# Altium PCB ctrl_board.PcbDoc
Units mm, origin at the board's own origin, x right, y up, seen from the top; angles counter-clockwise.
Board outline 152.4 x 101.6 mm, 2 copper layers (Top Layer, Bottom Layer); 168 components, 108 nets, 401 pads, 1 vias.
Unrouted connection lines stored in the file: 271.
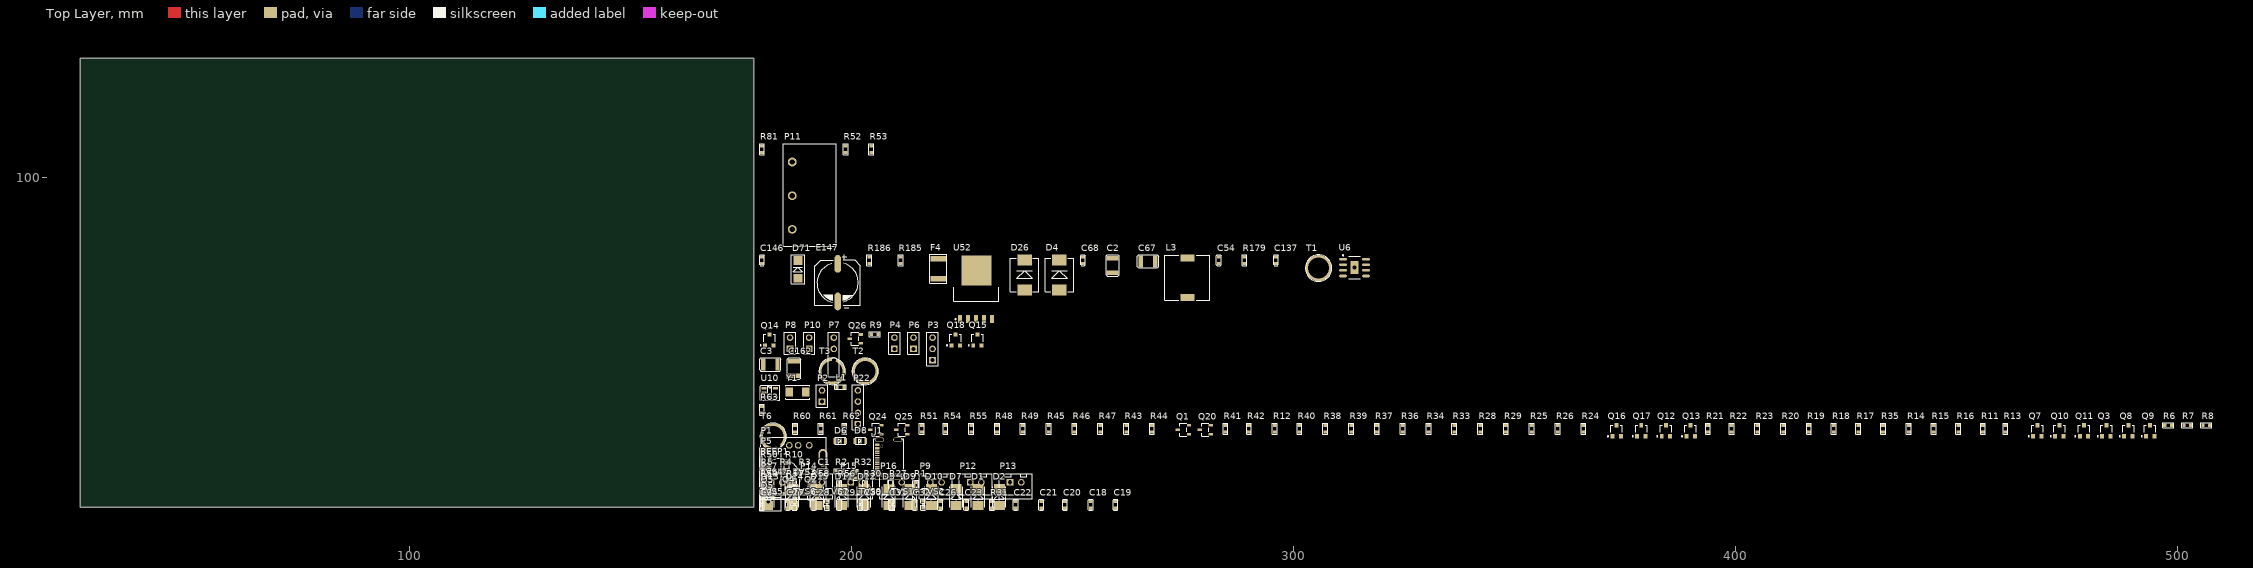
[diagram p0: Top Layer view]
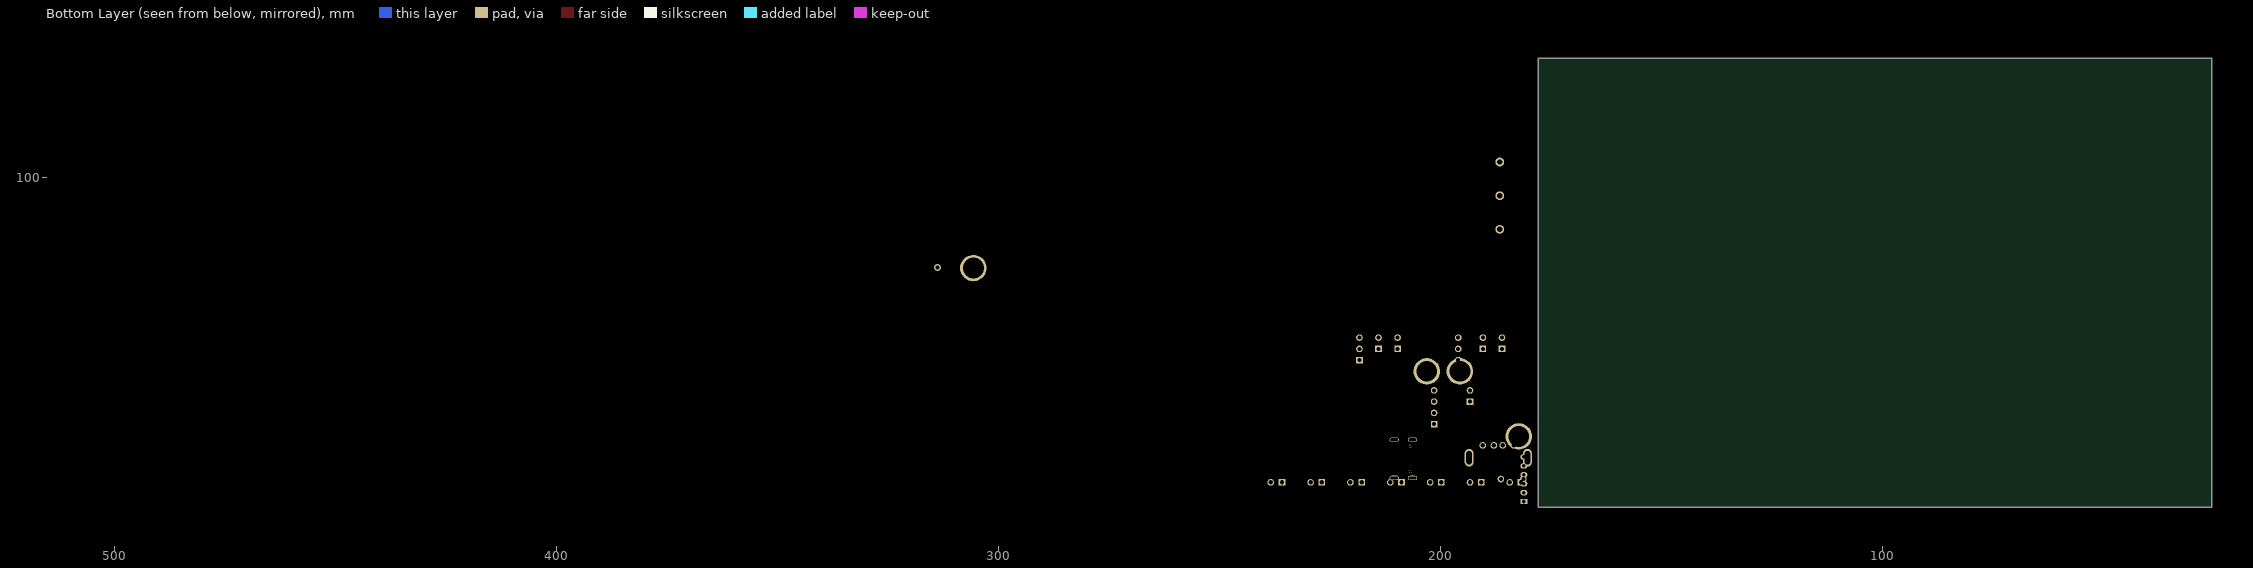
[diagram p1: Bottom Layer view, seen from below]

## Layer stack, top to bottom
Top Layer: signal copper 0.0356
Dielectric: dielectric 0.32, FR-4, Dk 4.8
Bottom Layer: signal copper 0.0356

## Board outline
25.4,25.4 177.8,25.4 177.8,127 25.4,127

## Design rules (kind name [scope] priority, off if disabled: settings)
Clearance [All] p1: gap=0.254
PolygonConnect [All] p1: connectstyle=Relief reliefconductorwidth=0.254 reliefentries=4 polygonreliefangle="90 Angle"
RoutingVias [All] p1: holewidth=0.711 width=1.27 viastyle="Through Hole" minholewidth=0.711 minwidth=1.27 maxholewidth=0.711 maxwidth=1.27
SilkscreenOverComponentPads [All] p1: minsilkscreentomaskgap=0.254
SolderMaskExpansion [All] p1: expansion=0.102
Width [All] p1: maxlimit=0.254 minlimit=0.254 preferedwidth=0.254
27 further rules are at their usual default settings.

## Classes and differential pairs
component class pt100: P11 R52 R53 R81
component class power: C2 C3 C54 C67 C68 C137 C146 D4 D26 D71 E147 F4 L3 Q6 R179 R185 R186 T2 T3 U6 U52
component class lcd: P5 R10 R63 TVS3 TVS4
component class drv: BEEP1 D1 D2 D3 D7 D9 D10 D11 D12 D13 D14 D15 P3 P4 P6 P7 P8 P9 P10 P12 P13 P14 P15 P16 P17 Q1 Q2 Q4 Q5 Q8 Q9 Q10 Q11 Q12 Q13 Q14 Q15 Q16 Q17 Q18 Q20 Q24 Q25 Q26 R6 R7 R8 R11 R13 R14 R15 R17 R18 R19 R20 R21 R22 R23 R24 R25 R26 R27 R28 R29 R30 R33 R34 R36 R37 R38 R39 R40 R41 R42 R43 R44 R45 R46 R47 R48 R49 R50 R51 R54 R55 R56 R57 R58 R59 R60 R61 R62 T1 TVS1 TVS2 TVS5 TVS6 TVS7 TVS9
component class cpu: C1 C18 C19 C20 C21 C22 C23 C26 C27 C28 C29 C30 C31 C32 C34 L1 P2 P22 R1 R2 R3 R4 R5 R9 R31 U3 U10 Y1
component class connector: D5 D6 D8 J1 P1

## Components (designator, comment, footprint, x,y, rotation, side; value= is the part's Value field where it differs from the comment)
BEEP1 "BEEP-9.5X5.5" BEEP-9.5X5.5 183.769,31.75 r0 top
C1 "0.1uF/50V/X5R" 0603C 192.659,33.528 r0 top
C2 "47uF/25V" 1210C 259.08,78.486 r90 top
C3 "22uF/10V" 1210C 179.959,57.658 r0 top
C18 "1uF/50V/X5R" 0603C 254.127,25.146 r90 top
C19 "0.1uF/50V/X5R" 0603C 259.715,25.146 r90 top
C20 "0.1uF/50V/X5R" 0603C 248.285,25.146 r90 top
C21 "0.1uF/50V/X5R" 0603C 242.951,25.146 r90 top
C22 "0.1uF/50V/X5R" 0603C 237.109,25.146 r90 top
C23 "0.1uF/50V/X5R" 0603C 225.933,25.146 r90 top
C26 "12P 50V" 0603C 220.091,25.146 r90 top
C27 "1uF/50V/X5R" 0603C 185.547,25.146 r90 top
C28 "0.1uF/50V/X5R" 0603C 191.389,25.146 r90 top
C29 "1uF/50V/X5R" 0603C 197.231,25.146 r90 top
C30 "0.1uF/50V/X5R" 0603C 203.073,25.146 r90 top
C31 "1uF/50V/X5R" 0603C 208.915,25.146 r90 top
C32 "0.1uF/50V/X5R" 0603C 214.249,25.146 r90 top
C34 "12P 50V" 0603C 179.705,25.146 r90 top
C54 "1uF" 0603C 283.083,80.518 r90 top
C67 "22uF/10V" 1210C 265.43,81.026 r0 top
C68 "0.1uF" 0603C 252.349,80.518 r90 top
C137 "0.01uF" 0603C 296.037,80.518 r90 top
C146 "0.1uF/50V" 0603C 179.705,80.518 r90 top
C162 "47uF/25V" 1210C 186.944,55.118 r90 top
D1 "1N4007" DO-214-AC 228.6,27.686 r90 top
D2 "1N4007" DO-214-AC 233.426,27.686 r90 top
D3 "1N4007" DO-214-AC 208.407,27.686 r90 top
D4 "SS54" SMC 247.015,74.549 r90 top
D5 "CESDB5V0D3" SOD323 179.578,27.94 r0 top
D6 "CESDB5V0D3" SOD323 196.215,40.386 r0 top
D7 "1N4007" DO-214-AC 223.647,27.686 r90 top
D8 "CESDB5V0D3" SOD323 200.787,40.386 r0 top
D9 "1N4007" DO-214-AC 213.233,27.686 r90 top
D10 "1N4007" DO-214-AC 218.059,27.686 r90 top
D11 "1N4007" DO-214-AC 197.739,27.686 r90 top
D12 "1N4007" DO-214-AC 202.819,27.686 r90 top
D13 "1N4007" DO-214-AC 180.975,27.686 r90 top
D14 "1N4007" DO-214-AC 186.563,27.686 r90 top
D15 "1N4007" DO-214-AC 192.151,27.686 r90 top
D26 "SMCJ24CA" SMC 239.141,74.549 r90 top
D71 "5.1V" SMA 187.833,77.216 r90 top
E147 "47uF/50V" Φ10×10 196.85,76.2 r0 top
F4 "2A" 1812-F 219.583,77.089 r90 top
J1 "TYPE C_16P" TYPEC_16P 210.058,36.322 r90 top
L1 "MPZ1608D101BTA00" 0603R 196.723,52.578 r0 top
L3 "CDRH105NP-100NC" CDRH105 270.891,82.423 r0 top
P1 "Header 6" USB-A 183.388,39.37 r0 top
P2 "Header 2" HDR1X2 193.294,49.276 r90 top
P3 "Header 3" HDR1X3 218.313,58.674 r90 top
P4 "Header 2" HDR1X2 209.677,61.214 r90 top
P5 "Header 6" 6X2MMZ 181.102,26.67 r90 top
P6 "Header 2" HDR1X2 213.995,61.214 r90 top
P7 "Header 4" HDR1X4 195.961,56.134 r90 top
P8 "Header 2" HDR1X2 186.055,61.214 r90 top
P9 "SIP-2" SIP-2A 219.075,30.988 r0 top
P10 "Header 2" HDR1X2 190.373,61.214 r90 top
P11 "Header 3" KF7.62-3P 186.563,88.265 r90 top
P12 "SIP-2" SIP-2A 228.092,30.988 r0 top
P13 "SIP-2" SIP-2A 237.109,30.988 r0 top
P14 "SIP-2" SIP-2A 192.024,30.988 r0 top
P15 "SIP-2" SIP-2A 201.041,30.988 r0 top
P16 "SIP-2" SIP-2A 210.058,30.988 r0 top
P17 "SIP-2" SIP-2A 183.007,30.988 r0 top
P22 "Header 4" HDR1X4 201.422,44.196 r90 top
Q1 "S8050" SOT23-3 276.352,41.91 r0 top
Q2 "MMBT9015" SOT23-3 192.151,27.559 r0 top
Q3 "BC817-16" SOT-23 483.997,42.672 r0 top
Q4 "MMBT9015" SOT23-3 187.198,27.559 r0 top
Q5 "MMBT9015" SOT23-3 182.245,27.559 r0 top
Q7 "AO3400" SOT-23 468.376,42.672 r0 top
Q8 "BC817-16" SOT-23 488.95,42.672 r0 top
Q9 "BC817-16" SOT-23 493.903,42.672 r0 top
Q10 "AO3400" SOT-23 473.329,42.672 r0 top
Q11 "AO3400" SOT-23 478.917,42.672 r0 top
Q12 "BC817-16" SOT-23 384.302,42.672 r0 top
Q13 "BC817-16" SOT-23 389.89,42.672 r0 top
Q14 "LH8050QLT1G" SOT-23 181.356,63.246 r0 top
Q15 "BC817-16" SOT-23 228.473,63.246 r0 top
Q16 "AO3400" SOT-23 373.126,42.672 r0 top
Q17 "AO3400" SOT-23 378.714,42.672 r0 top
Q18 "AO3400" SOT-23 223.52,63.246 r0 top
Q20 "S8050" SOT23-3 281.305,41.91 r0 top
Q24 "S8050" SOT23-3 206.756,41.91 r0 top
Q25 "S8050" SOT23-3 212.598,41.91 r0 top
Q26 "S8050" SOT23-3 202.057,62.484 r0 top
R1 "10K" 0603R 214.503,29.464 r90 top
R2 "10K" 0603R 196.596,33.528 r0 top
R3 "100K" 0603R 188.341,33.528 r0 top
R4 "100K" 0603R 184.023,33.528 r0 top
R5 "20K" 0603R 179.705,33.528 r0 top
R6 "100R" 0603R 497.205,43.942 r0 top
R7 "100R" 0603R 501.523,43.942 r0 top
R8 "100R" 0603R 505.841,43.942 r0 top
R9 "49.9" 0603R 204.47,64.516 r0 top
R10 "100R" 0603R 185.293,33.782 r90 top
R11 "10K" 0603R 456.057,42.418 r90 top
R12 "100" 0603R 295.783,42.418 r90 top
R13 "10K" 0603R 461.137,42.418 r90 top
R14 "10K" 0603R 439.293,42.418 r90 top
R15 "10K" 0603R 444.881,42.418 r90 top
R16 "10K" 0603R 450.469,42.418 r90 top
R17 "10K" 0603R 427.863,42.418 r90 top
R18 "1K" 0603R 422.275,42.418 r90 top
R19 "1K" 0603R 416.687,42.418 r90 top
R20 "10K" 0603R 410.845,42.418 r90 top
R21 "100R" 0603R 393.827,42.418 r90 top
R22 "100R" 0603R 399.161,42.418 r90 top
R23 "100R" 0603R 405.003,42.418 r90 top
R24 "1K" 0603R 365.633,42.418 r90 top
R25 "10K" 0603R 353.949,42.418 r90 top
R26 "10K" 0603R 359.791,42.418 r90 top
R27 "10K" 0603R 208.915,29.464 r90 top
R28 "10K" 0603R 342.265,42.418 r90 top
R29 "10K" 0603R 348.107,42.418 r90 top
R30 "10K" 0603R 203.073,29.464 r90 top
R31 "100K" 0603R 231.775,25.146 r90 top
R32 "10K" 0603R 200.914,32.004 r90 top
R33 "10K" 0603R 336.423,42.418 r90 top
R34 "10K" 0603R 330.581,42.418 r90 top
R35 "10K" 0603R 433.451,42.418 r90 top
R36 "1K" 0603R 324.739,42.418 r90 top
R37 "1K" 0603R 318.897,42.418 r90 top
R38 "10K" 0603R 307.213,42.418 r90 top
R39 "10K" 0603R 313.055,42.418 r90 top
R40 "100" 0603R 301.371,42.418 r90 top
R41 "1K" 0603R 284.607,42.418 r90 top
R42 "1K" 0603R 289.941,42.418 r90 top
R43 "1K" 0603R 262.128,42.418 r90 top
R44 "1K" 0603R 267.97,42.418 r90 top
R45 "10K" 0603R 244.602,42.418 r90 top
R46 "10K" 0603R 250.444,42.418 r90 top
R47 "10K" 0603R 256.286,42.418 r90 top
R48 "100" 0603R 232.918,42.418 r90 top
R49 "100" 0603R 238.76,42.418 r90 top
R50 "100" 0603R 179.705,33.782 r90 top
R51 "1K" 0603R 215.9,42.418 r90 top
R52 "2K" 0603R 198.628,105.664 r90 top
R53 "2K" 0603R 204.47,105.664 r90 top
R54 "1K" 0603R 221.234,42.418 r90 top
R55 "1K" 0603R 227.076,42.418 r90 top
R56 "51R" 0603R 197.231,29.464 r90 top
R57 "4.7K" 0603R 185.547,29.464 r90 top
R58 "1K" 0603R 191.389,29.464 r90 top
R59 "47K" 0603R 179.705,29.464 r90 top
R60 "1K" 0603R 187.198,42.418 r90 top
R61 "1K" 0603R 193.04,42.418 r90 top
R62 "10K" 0603R 198.374,42.418 r90 top
R63 "100R" 0603R 179.705,46.736 r90 top
R81 "75" 0603R 179.705,105.664 r90 top
R179 "100K" 0603R 288.925,80.518 r90 top
R185 "120K/1%" 0603R 211.074,80.518 r90 top
R186 "71.5K/1%" 0603R 203.962,80.518 r90 top
T1 "12V-" FIX-4.5 305.689,79.502 r0 top
T2 "12V" FIX-4.5 203.073,56.134 r0 top
T3 "GND" FIX-4.5 195.58,56.134 r0 top
T6 "12V" FIX-4.5 182.245,41.402 r0 top
TVS1 "ESD5Z5.0CT1G" SOD-523 209.296,26.035 r90 top
TVS2 "ESD5Z5.0CT1G" SOD-523 216.154,26.035 r90 top
TVS3 "ESD5Z5.0CT1G" SOD-523 187.071,30.48 r90 top
TVS4 "ESD5Z5.0CT1G" SOD-523 179.705,30.48 r90 top
TVS5 "ESD5Z5.0CT1G" SOD-523 179.705,26.035 r90 top
TVS6 "ESD5Z5.0CT1G" SOD-523 187.071,26.035 r90 top
TVS7 "ESD5Z5.0CT1G" SOD-523 194.437,26.035 r90 top
TVS9 "ESD5Z5.0CT1G" SOD-523 201.93,26.035 r90 top
U6 "LM22676MRE-5.0/NOPB" SOP127P600X168_HS-8N 313.817,79.629 r0 top
U10 "AD8615AUJZ-R2" sot-23-5 181.483,51.308 r0 top
U52 "MIC29302" TO228P1435X457-6N 224.536,67.945 r90 top
Y1 "8MHz" CRAY_5032 185.928,51.435 r0 top

## Footprints (in the part's own frame and the unit in brackets; to place one, negate y for a bottom-side part, rotate by r counter-clockwise, add the part's x,y. Pads: shape width x height; smd on the part's side, far side on the other; paste and mask are expansions set on the pad)
6X2MMZ [mm]
  rect 1.2x1.6 hole 0.8: 1(0,0)
  oval 1.2x1.6 hole 0.8: 2(2,0) 3(4,0) 4(6.05,0) 5(8.05,0) 6(10.08,0)
  silkscreen extent -2.05,-2.95 12.12,1.85
0603C [mm]
  rect 0.7x0.85 smd: 1(0,0) 2(1.5,0)
  silkscreen extent -0.5,-0.55 2,0.55
0603R [mm]
  rect 0.7x0.85 smd: 1(0,0) 2(1.5,0)
  silkscreen extent -0.5,-0.55 2,0.55
1210C [mm]
  rect 1x2.7 smd: 1(0,0) 2(3.25,0)
  silkscreen extent -0.8,-1.5 4.05,1.5
1812-F [mm]
  rect 1.3x3.5 smd: 1(0,0) 2(4.5,0)
  silkscreen extent -1,-1.95 5.5,1.95
BEEP-9.5X5.5 [mm]
  round 1.5 hole 0.9: 1(-2.54,0) 2(2.54,0)
  silkscreen extent -4.6,-4.6 4.6,4.6
CDRH105 [mm]
  rect 3.2x1.6 smd: 1(5.1,-0.65) 2(5.1,-9.55)
  silkscreen extent 0,-10.2 10.2,0
CRAY_5032 [mm]
  rect 1.7x2 smd: 1(0,0) 2(3.7,0)
  silkscreen extent -0.86,-1.6 4.55,1.6
DO-214-AC [mm]
  rect 2x2.5 smd: 1(-1.915,0) 2(1.915,0)
  silkscreen extent -2.3,-1.52 2.3,1.5, body extent -2.3,-1.35 2.3,1.35, height 2.4
FIX-4.5 [mm]
  round 6 hole 4.7: 1(0,0)
  silkscreen extent -3,-3 3,3
HDR1X2 [mm] "Connector; Header; 2 Position"
  rect 1.5x1.5 hole 0.9: 1(0,0)
  round 1.5 hole 0.9: 2(2.54,0)
  silkscreen extent -1.27,-1.27 3.81,1.27
HDR1X3 [mm] "Connector; Header; 3 Position"
  rect 1.5x1.5 hole 0.9: 1(0,0)
  round 1.5 hole 0.9: 2(2.54,0) 3(5.08,0)
  silkscreen extent -1.27,-1.27 6.35,1.27
HDR1X4 [mm] "Connector; Header; 4 Position"
  rect 1.5x1.5 hole 0.9: 1(0,0)
  round 1.5 hole 0.9: 2(2.54,0) 3(5.08,0) 4(7.62,0)
  silkscreen extent -1.27,-1.27 8.89,1.27
KF7.62-3P [mm]
  round 2 hole 1.3: 1(0,0)
  round 2 hole 1.2: 2(7.62,0) 3(15.24,0)
  silkscreen extent -3.81,-10 19.38,2
SIP-2A [mm]
  rect 1.5x1.5 hole 1: 1(-1.27,0)
  round 1.5 hole 1: 2(1.27,0)
  silkscreen extent -3.75,-3.68 3.75,2.02, body extent -3.7,-3.81 3.7,2.29, height 7.5
SMA [mm]
  rect 2x2 smd: 1(0,0) 2(4,0)
  silkscreen extent -1.3,-1.5 5.3,1.5
SMC [mm]
  rect 2.5x3.3 smd: 1(0,0) 2(6.75,0)
  silkscreen extent -0.35,-3.25 7.15,3.25
SOD323 [mm]
  rect 0.65x1.35 smd: 1(0,0) 2(2.4,0)
  silkscreen extent -0.03,-0.8 2.44,0.8
SOD-523 [mil]
  rect 31.5x30 smd: 1(-30,0) 2(30,0)
  silkscreen extent -51,-20 51,20, body extent -31,-16 31,16, height 26
SOP127P600X168_HS-8N [mm] "SOP, 8-Leads, Body 5.0x4.0mm (max), Pitch 1.27mm, IPC Medium Density"
  oval 1.75x0.6 smd: 1(-2.6,1.905) 2(-2.6,0.635) 3(-2.6,-0.635) 4(-2.6,-1.905) 5(2.6,-1.905) 6(2.6,-0.635) 7(2.6,0.635) 8(2.6,1.905)
  rect 1.9x3 smd: 9(0,0)
  silkscreen extent -2.72,-2.5 1.33,2.88, body extent -2,-2.5 2,2.5, height 1.68
SOT23-3 [mm]
  rect 1x0.6 smd: 1(0,0) 2(0,2) 3(-2.5,1)
  silkscreen extent -2.1,-0.5 -0.5,2.5
SOT-23 [mm] "SOT-23; 3 Leads; Body 3.0 x 2.6 mm, inc. leads (LxW max)"
  rect 0.9x0.95 smd: 1(-0.95,-1.25) 2(0.95,-1.25) 3(0,1.25)
  silkscreen extent -2.07,-1.37 1.3,1.25
sot-23-5 [mm]
  rect 1.2x0.5 smd: 1(-1.3,1) 2(-1.3,0) 3(-1.3,-1) 4(1.3,-1) 5(1.3,1)
  silkscreen extent -2.2,-1.7 2.2,1.7
TO228P1435X457-6N [mm] "D2-PAK, 6-Pads, Body 8.6x10.2mm (max), IPC Medium Density"
  rect 1.85x0.95 smd: 1(0,0) 2(0,-1.8) 3(0,-3.6) 4(0,-5.4) 5(0,-7.2)
  rect 6.8x6.8 smd: 6(11,-3.671)
  silkscreen extent -0.12,-8.77 7.2,1.43, body extent 4.2,-8.77 12.84,1.43, height 4.57
TYPEC_16P [mm]
  oval 1x2.1 hole 0.65 slot 1.7 at 90 deg: 1(-4.32,-0.391) 1(-4.32,3.759) 1(4.32,-0.391) 1(4.32,3.759)
  round 0.67 hole 0.67: 2(-2.89,3.259) 2(2.89,3.259)
  rect 0.3x1 smd: A1(-3.05,4.293) A4(-2.25,4.293) A5(-1.25,4.293) A6(-0.25,4.293) A7(0.25,4.293) A8(1.25,4.293) A9(2.25,4.293) A12(3.35,4.293) B1(3.05,4.293) B4(2.55,4.293) B5(1.75,4.293) B6(0.75,4.293) B7(-0.75,4.293) B8(-1.75,4.293) B9(-2.55,4.293) B12(-3.35,4.293)
  silkscreen extent -4.44,-1.73 4.49,5.07
USB-A [mm]
  round 1.5 hole 1: 1(0,0) 2(2.5,0) 3(4.5,0) 4(7,0)
  oval 2x4 hole 1.2 slot 3 at 90 deg: 5(-3.1,-2.8) 6(10.1,-2.8)
  silkscreen extent -3.91,-12.17 10.89,1.83
Φ10×10 [mm]
  oval 1.524x4 smd: 1(0,4.25) 2(0,-4.25)
  silkscreen extent -5.15,-5.71 5.15,6.35

## Part data
C1 C18 C19 C20 C21 C22 C23 C26 C27 C28 C29 C30 C31 C32 C34: library part CAP4, "贴片电容 20%"
C2 C3 C54 C67 C68 C137 C162: library part CAP, "Capacitor"
C146: library part Cap, "Capacitor"
D1 D2 D3 D7 D9 D10 D11 D12 D13 D14 D15: library part DIODE2, "贴片二极管"
D4 D5 D6 D8 D26 D71: library part "DIODE S", "Schottky Diode"
E147: library part "Cap Pol1", "Polarized Capacitor (Radial)"
F4: library part "Fuse 1", "Fuse"
L1: library part CIZHU1, "磁珠电感 100R 100MHz"
L3: library part INDUCTOR
P1 P5: "Header, 6-Pin"
P2 P4 P6 P8 P10: "Header, 2-Pin"
P3 P11: "Header, 3-Pin"
P7 P22: "Header, 4-Pin"
P9 P12 P13 P14 P15 P16 P17: "XH2.54 2P 立贴"
Q1 Q20 Q24 Q25 Q26: library part NPN, "NPN Bipolar Transistor"
Q2 Q4 Q5: library part PNP
Q3 Q8 Q9 Q12 Q13 Q15: library part NPN-1, "三极管"
Q7 Q10 Q11 Q16 Q17 Q18: library part "MOSFET N", "MOSFET N"
Q14: library part NPN-1, "NPN"
R1 R2 R10 R31 R32 R63: library part RES2, "贴片电阻 5%"
R3 R4 R5 R9 R17 R18 R19 R20 R24 R33 R34 R36 R37 R38 R39 R41 R42 R43 R44 R45 R46 R47 R51 R54 R55 R60 R61 R62 R179: library part Res1, "Resistor"
R6 R7 R8 R11 R12 R13 R14 R15 R16 R21 R22 R23 R25 R26 R27 R28 R29 R30 R35 R40 R48 R49 R50: library part RES-SOP, "贴片电阻 5%"
R52 R53 R81: library part R
R56 R57 R58 R59: library part RES0, "贴片电阻 5%"
R185 R186: library part R, "R"
T1 T2 T3 T6: library part TP
TVS1 TVS2 TVS3 TVS4 TVS5 TVS6 TVS7 TVS9: library part TVS-1, "TVS"
U6: library part LM22676MR-5.0
U10: library part AD8615
Y1: library part XTAL, "晶振"

## Via types
v1: diameter 1.5, hole 1, Top Layer to Bottom Layer, 1 vias

## Nets (pads, with @x,y where several pads share a name; then routed paths per layer and width w, separated by ;. In a path a pad name is that pad's centre, name@x,y a point inside that pad or via, vN(x,y) a via of type N, cw(c..) or ccw(c..) an arc to the next point about the centre after c; other vN are vias at no path point)
3.3V_MCU: P22.1
AIR_12V: T6.1
AIR_FREQ: 
AIR_PWR: 
AIR_RXD: 
AIR_TXD: 
BATTERY: R9.1 U10.1 U10.4
BLE_RXD: 
BLE_TXD: 
BOOT0: P2.2 R2.1
COOL1: 
COOL2: 
COOL3: 
COOL4: 
D+: D5.2 J1.A6 J1.B6 P1.3
D-: D8.2 J1.A7 J1.B7 P1.2
FGND: C3.2 C67.2 C68.2 D4.1 U6.6 U6.9
  other v1: 313.817,79.629
GND: C1.1 C2.2 C18.1 C19.1 C20.1 C21.1 C22.1 C23.1 C26.1 C27.1 C28.1 C29.1 C30.1 C31.1 C32.1 C34.1 C54.1 C146.1 C162.2 D5.1 D6.1 D8.1 D26.1 D71.1 E147.2 J1.1 J1.A1 J1.A12 J1.B1 J1.B12 P1.4 P1.5 P1.6 P3.3 P5.2 P7.4 P11.1 P17.2 P22.3 Q1.2 Q2.3 Q4.3 Q5.3 Q7.2 Q10.2 Q11.2 Q14.2 Q16.2 Q17.2 Q18.2 Q20.2 Q24.2 Q25.2 Q26.2 R2.2 R5.2 R11.1 R13.1 R14.2 R15.2 R16.1 R25.1 R26.1 R27.1 R28.2 R29.2 R30.2 R33.2 R35.2 R43.2 R44.2 R59.2 R60.2 R61.2 R62.2 R81.1 R186.1 T1.1 T3.1 TVS1.1 TVS2.1 TVS3.1 TVS4.1 TVS5.1 TVS6.1 TVS7.1 TVS9.1 U10.2 U52.3 U52.6
HEATER_1: 
HEATER_2: 
HEATER_3: 
HEATER_4: 
NetBEEP1_1: BEEP1.1 R56.1 R58.2
NetBEEP1_2: BEEP1.2 Q14.3 R58.1
NetC20_2: C20.2
NetC21_2: C21.2
NetC22_2: C22.2 L1.1
NetC23_2: C23.2 R1.2
NetC30_2: C30.2 R9.2
NetC137_1: C137.1 D4.2 L3.1 U6.8
NetC137_2: C137.2 U6.1
NetD1_1: D1.1 P12.2 Q10.3
NetD2_1: D2.1 P13.2 Q11.3
NetD3_1: D3.1 P14.2 Q16.3
NetD7_1: D7.1 P9.2 Q7.3
NetD9_1: D9.1 P15.2 Q17.3
NetD10_1: D10.1 P16.2 Q18.3
NetD11_1: D11.1 R12.2
NetD11_2: D11.2 Q1.3 R12.1 R38.1
NetD12_1: D12.1 R40.2
NetD12_2: D12.2 Q20.3 R39.1 R40.1
NetD13_1: D13.1 R48.2
NetD13_2: D13.2 Q24.3 R45.1 R48.1
NetD14_1: D14.1 R49.2
NetD14_2: D14.2 Q25.3 R46.1 R49.1
NetD15_1: D15.1 R50.2
NetD15_2: D15.2 Q26.3 R47.1 R50.1
NetD71_2: D71.2 F4.1 R185.1 U52.4
NetP2_1: P2.1 R32.1
NetP3_1: P3.1 Q2.2 R17.1
NetP3_2: P3.2 R24.1 R33.1
NetP4_2: P4.2
NetP5_3: P5.3 R10.1 TVS3.2
NetP5_4: P5.4 R63.1 TVS4.2
NetP6_2: P6.2
NetP8_2: P8.2
NetP10_2: P10.2
NetP17_1: P17.1 Q5.2 R34.1
NetQ1_1: Q1.1 R41.1
NetQ2_1: Q2.1 R19.1
NetQ3_1: Q3.1 R6.1 R16.2
NetQ3_2: Q3.2 Q7.1 R35.1 TVS9.2
NetQ4_1: Q4.1 R24.2
NetQ5_1: Q5.1 R37.1
NetQ8_1: Q8.1 R7.1 R11.2
NetQ8_2: Q8.2 Q10.1 R14.1 TVS1.2
NetQ9_1: Q9.1 R8.1 R13.2
NetQ9_2: Q9.2 Q11.1 R15.1 TVS2.2
NetQ12_1: Q12.1 R21.1 R25.2
NetQ12_2: Q12.2 Q16.1 R28.1 TVS5.2
NetQ13_1: Q13.1 R22.1 R26.2
NetQ13_2: Q13.2 Q17.1 R29.1 TVS6.2
NetQ14_1: Q14.1 R57.2 R59.1
NetQ15_1: Q15.1 R23.1 R27.2
NetQ15_2: Q15.2 Q18.1 R30.1 TVS7.2
NetQ20_1: Q20.1 R42.1
NetQ24_1: Q24.1 R51.1
NetQ25_1: Q25.1 R54.1
NetQ26_1: Q26.1 R55.1
NetQ27_4: T2.1
NetR3_2: R3.2 R4.1
NetR4_2: R4.2 R5.1 U10.3
NetR10_2: R10.2
NetR31_2: R31.2
NetR57_1: R57.1
NetR63_2: R63.2
NetR179_1: R179.1 U6.5
NetR185_2: R185.2 R186.2 U52.5
OSC_IN: C26.2 Y1.2
OSC_OUT: C34.2 Y1.1
PT2_1: P11.2 P11.3 R52.1
PT2_2: R53.1 R81.2
PT_VREF: R52.2 R53.2
SWCLK: P22.4
SWDIO: P22.2
USB_ID: 
USB_N: 
USB_P: 
V5.0: R56.2
VCC: C1.2 C18.2 C19.2 C27.2 C28.2 C29.2 C31.2 C32.2 L1.2 R1.1 R18.1 R20.2 R31.1 R32.2 R36.1 U10.5
VCC_3.3V: C146.2 E147.1 F4.2
VCC_5V: C3.1 C67.1 C68.1 L3.2 P7.1 R17.2 R34.2 U6.4 U52.1 U52.2
VCC_HEATER: D2.2 D10.2 P4.1 P6.1 P8.1 P10.1 P13.1 P16.1 Q3.3 Q8.3 Q9.3 Q12.3 Q13.3 Q15.3 R38.2 R39.2 R45.2 R46.2 R47.2
VCC_IN: 
VDD5V: P5.1
VDD12V: D1.2 D3.2 D7.2 D9.2 P9.1 P12.1 P14.1 P15.1
VIN: C2.1 C54.2 C162.1 D26.2 R3.1 R179.2 U6.7
VUSB: D6.2 J1.A4 J1.A9 J1.B4 J1.B9 P1.1
pads on no net: J1.2 J1.A5 J1.A8 J1.B5 J1.B8 P5.5 P5.6 P7.2 P7.3 Q4.2 R6.2 R7.2 R8.2 R18.2 R19.2 R20.1 R21.2 R22.2 R23.2 R36.2 R37.2 R41.2 R42.2 R43.1 R44.1 R51.2 R54.2 R55.2 R60.1 R61.1 R62.1 U6.2 U6.3